# EAGLE board cs4272_test (EAGLE 6.5.0)
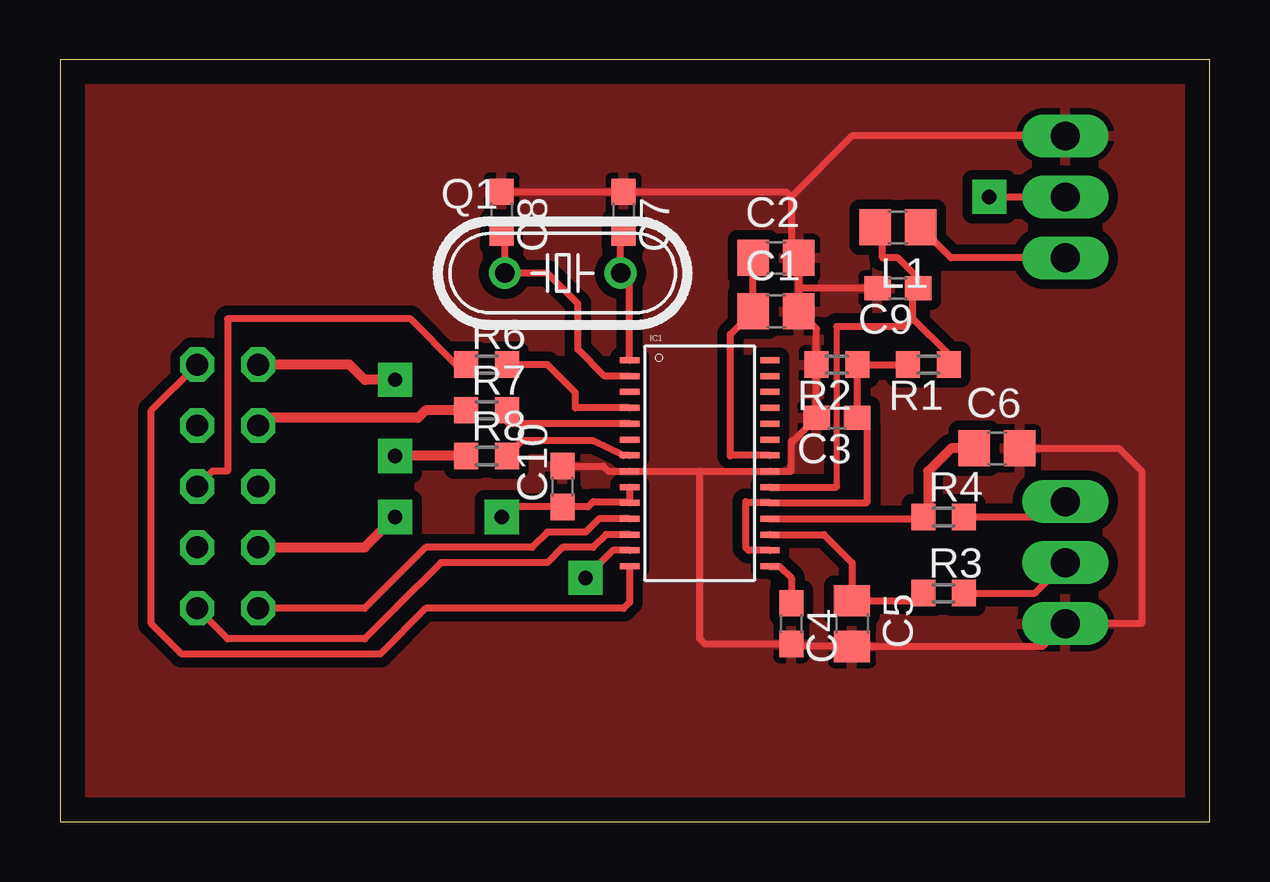
[diagram p0: board, top side]
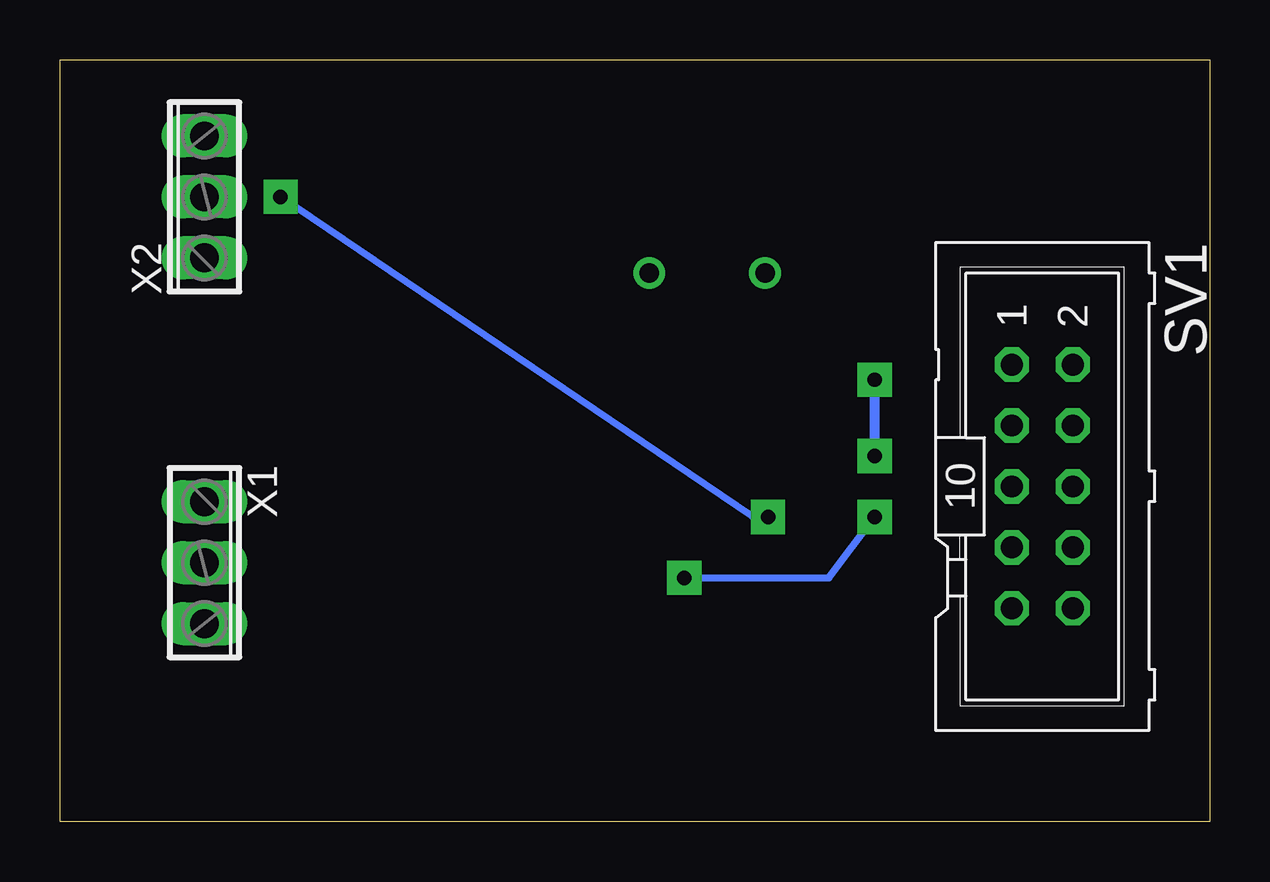
[diagram p1: board, bottom side, seen from below]

Size 47.93 x 31.74 mm. Coordinates in mm from the lower left corner, seen from the top.
Outline: 0,0 47.93,0 47.93,31.74 0,31.74 0,0
Copper layers (1*16): Top 0.035mm / dielectric 1.5mm / Bottom 0.035mm
Design rules "default": minimum track width 10mil, minimum drill 24mil, track to track 8mil, track to pad 8mil, pad to pad 8mil, via to via 8mil, smd to smd 8mil, copper to edge 40mil, drill to drill 8mil, minimum pad ring 10mil, minimum via ring 8mil, stop-mask expansion 4mil, vias tented up to drill 0mil, thermal gap 10mil

## Footprints (pad centres in the part's own frame; a part is rotated, then mirrored left to right if it is on the bottom)
C0805 = smd 1.3 x 1.5: 1 -0.95,0; 2 0.95,0
C0603 = smd 1.1 x 1: 1 -0.85,0; 2 0.85,0
TSSOP28 = smd 0.8 x 0.25: 1 -2.921,4.623; 2 -2.921,3.962; 3 -2.921,3.302; 4 -2.921,2.642; 5 -2.921,1.981; 6 -2.921,1.321; 7 -2.921,0.66; 8 -2.927,0; 9 -2.921,-0.66; 10 -2.921,-1.321; 11 -2.921,-1.981; 12 -2.921,-2.642; 13 -2.921,-3.302; 14 -2.921,-3.962; 15 2.921,-3.962; 16 2.921,-3.302; 17 2.921,-2.642; 18 2.921,-1.981; 19 2.921,-1.321; 20 2.921,-0.66; 21 2.927,0; 22 2.921,0.66; 23 2.921,1.321; 24 2.921,1.981; 25 2.921,2.642; 26 2.921,3.302; 27 2.921,3.962; 28 2.921,4.623
HC49/S = drill 0.813: 1 -2.413,0; 2 2.413,0
R0603 = smd 1 x 1.1: 1 -0.85,0; 2 0.85,0
ML10 = drill 0.914 octagon: 1 -5.08,-1.27; 2 -5.08,1.27; 3 -2.54,-1.27; 4 -2.54,1.27; 5 0,-1.27; 6 0,1.27; 7 2.54,-1.27; 8 2.54,1.27; 9 5.08,-1.27; 10 5.08,1.27
3POL254 = drill 1.2 long: 1 -2.54,0; 2 0,0; 3 2.54,0

## Placement (x,y rotation side)
C1  10mk  [C0805]  29.84,21.27 0 top
C2  47n  [C0805]  29.84,23.5 0 top
C3  1mk  [C0603]  32.38,16.83 180 top
C4  1mk  [C0603]  30.48,8.26 270 top
C5  100  [C0805]  33.02,8.26 270 top
C6  100  [C0805]  39.05,15.56 0 top
C7  22  [C0603]  23.5,25.4 270 top
C8  22  [C0603]  18.41,25.4 270 top
C9  1mk  [C0603]  34.92,22.23 180 top
C10  1mk  [C0603]  20.95,13.97 90 top
IC1  CS4272  [TSSOP28]  26.67,14.61 0 top
L1  1000Z  [C0805]  34.92,24.77 180 top
Q1  [HC49/S]  20.95,22.86 0 top
R1  51k  [R0603]  36.2,19.05 180 top
R2  51k  [R0603]  32.38,19.05 180 top
R3  560  [R0603]  36.83,9.53 0 top
R4  560  [R0603]  36.83,12.7 0 top
R6  56  [R0603]  17.78,19.05 0 top
R7  56  [R0603]  17.78,17.14 0 top
R8  56  [R0603]  17.78,15.24 0 top
SV1  [ML10]  6.99,13.97 270 bottom
X1  [3POL254]  41.91,10.79 270 bottom
X2  [3POL254]  41.91,26.04 90 bottom

## Library data of the parts
C1-C10 L1 R1-R4 R6-R8 = rcl
IC1 = balmer
Q1 = crystal; OC_FARNELL: 1667008; OC_NEWARK: unknown
SV1 = con-ml; OC_FARNELL: unknown; OC_NEWARK: unknown
X1 X2 = con-phoenix-254; OC_FARNELL: unknown; OC_NEWARK: unknown

## Nets
+2.5V: C3.1 IC1.16 IC1.19 R1.2 R2.1
+3V3: C10.1 IC1.9 IC1.10 X2.2
+5V: C9.1 IC1.20 L1.2 R1.1
CCLK: IC1.11 SV1.9
CDIN: IC1.12 SV1.10
GND: C1.2 C2.2 C3.2 C4.2 C5.2 C6.2 C7.1 C8.1 C9.2 C10.2 IC1.8 IC1.21 R2.2 X1.3 X2.3
INA: R3.2 X1.2
INB: R4.2 X1.1
N$1: C1.1 C2.1 IC1.22
N$2: C4.1 IC1.15
N$3: C6.1 IC1.18 R4.1
N$4: C5.1 IC1.17 R3.1
N$5: C8.2 IC1.2 Q1.1
N$6: C7.2 IC1.1 Q1.2
N$7: L1.1 X2.1
N$10: IC1.4 R6.2
N$11: IC1.5 R7.2
N$12: IC1.7 R8.2
PA10: IC1.13 SV1.7
PA13: SV1.8
PA14: SV1.5
PC11: SV1.4
PD0: IC1.14 SV1.2
SPI3_MOSI(PC12): R8.1 SV1.1
SPI3_NSS(PA15): R6.1 SV1.6
SPI3_SCK(PC10): R7.1 SV1.3

## Tracks (layer width: path | path; a pad name or v marks a point on that pad's centre or on a via)
+2.5V
  Top 0.3: IC1.16 28.7,11.3 28.57,11.43 28.57,13.34 28.63,13.28 IC1.19 33.6,13.28 33.66,13.34 33.66,16.41 C3.1 R2.1 R1.2
+3V3  (via drill 0.6 pad 1.42)
  Top 0.3: IC1.9 IC1.10 23.7,13.34 22.23,13.34 22.01,13.12 C10.1 18.84,13.12 v18.41,12.7 | v38.73,26.04 X2.2
  Bottom 0.3: v18.41,12.7 19.05,12.7 v38.73,26.04
+5V
  Top 0.254: 32.38,13.97 32.38,20.64
  Top 0.3: IC1.20 32.36,13.95 32.38,13.97 | 32.38,20.64 35.24,20.64 35.56,20.95 | 35.56,20.95 35.56,22.01 C9.1 35.77,22.64 34.92,23.5 34.29,23.5 34.29,24.45 L1.2 | R1.1 37.05,19.47 35.56,20.95
CCLK
  Top 0.3: IC1.11 22.47,12.62 21.91,12.06 20.32,12.06 19.68,11.43 15.24,11.43 12.7,8.89 SV1.9
CDIN
  Top 0.3: IC1.12 22.76,11.96 22.23,11.43 20.95,11.43 20.32,10.79 15.88,10.79 13.97,8.89 12.7,7.62 6.99,7.62 SV1.10
GND
  Top 0.3: C8.1 C7.1 30.27,26.25 30.48,26.04 | 26.67,14.61 IC1.8 22.86,14.61 22.64,14.82 C10.2 | 26.67,14.61 IC1.21 30.48,14.61 30.48,15.88 30.58,15.88 C3.2 R2.2 31.54,20.53 C1.2 30.8,22.23 | 26.67,14.61 26.67,7.62 26.89,7.41 C4.2 30.58,7.3 C5.2 40.96,7.3 X1.3 45.09,8.26 45.09,14.61 44.13,15.56 C6.2 | 30.8,22.23 C2.2 30.48,23.81 30.48,26.04 | C9.2 30.8,22.23 | X2.3 33.02,28.57 30.48,26.04
  pour Top (isolate 0.406): 0,0 48.26,0 48.26,31.75 0,31.75
INA
  Top 0.3: R3.2 40.64,9.53 X1.2
INB
  Top 0.3: R4.2 41.27,12.7 X1.1
N$1
  Top 0.3: IC1.22 27.96,15.27 27.94,15.24 27.94,20.32 C1.1 C2.1
N$2
  Top 0.3: IC1.15 30,10.64 30.48,10.16 C4.1
N$3
  Top 0.3: IC1.18 35.9,12.62 R4.1
  Top 0.406: C6.1 37.15,15.56 36.2,14.61 36.2,12.91 R4.1
N$4
  Top 0.3: IC1.17 31.85,11.96 33.02,10.79 C5.1 35.66,9.21 R3.1
N$5
  Top 0.3: IC1.2 22.71,18.57 21.59,19.68 21.59,21.59 20.32,22.86 Q1.1 18.54,24.42 C8.2
N$6
  Top 0.3: IC1.1 23.75,22.48 Q1.2 23.37,24.42 C7.2
N$7
  Top 0.3: X2.1 37.15,23.5 L1.1
N$10
  Top 0.3: IC1.4 21.49,17.25 21.49,17.88 20.32,19.05 R6.2
N$11
  Top 0.3: IC1.5 18.71,16.59 R7.2
N$12
  Top 0.3: 18.66,15.27 R8.2 19.27,15.88 22.23,15.88 23.47,15.27 IC1.7
PA10  (via drill 0.6 pad 1.42)
  Top 0.3: IC1.13 23.05,11.3 v21.91,10.16
  Top 0.406: SV1.7 12.7,11.43 v13.97,12.7
  Bottom 0.3: v21.91,10.16 15.88,10.16 v13.97,12.7
PD0
  Top 0.3: IC1.14 23.75,9.14 23.5,8.89 15.24,8.89 13.34,6.99 5.08,6.99 3.81,8.26 3.81,17.14 SV1.2
SPI3_MOSI(PC12)  (via drill 0.6 pad 1.42)
  Top 0.406: R8.1 v13.97,15.24 | v13.97,18.41 12.7,18.41 12.06,19.05 SV1.1
  Bottom 0.406: v13.97,15.24 v13.97,18.41
SPI3_NSS(PA15)
  Top 0.3: R6.1 16.51,19.05 14.61,20.95 6.99,20.95 6.99,14.61 6.35,14.61 SV1.6
SPI3_SCK(PC10)
  Top 0.406: R7.1 15.24,17.14 14.92,16.83 8.57,16.83 SV1.3